# Altium PCB Flight_Computer_1.PcbDoc (part 1 of 4)
Units mm, origin at the board's own origin, x right, y up, seen from the top; angles counter-clockwise.
Board outline 101.6 x 76.2 mm, 4 copper layers (Top Layer, GND, 3.3V, Bottom Layer), stack 1.574 mm thick; 111 components, 86 nets, 493 pads, 1677 vias.
Unrouted connection lines stored in the file: 302.
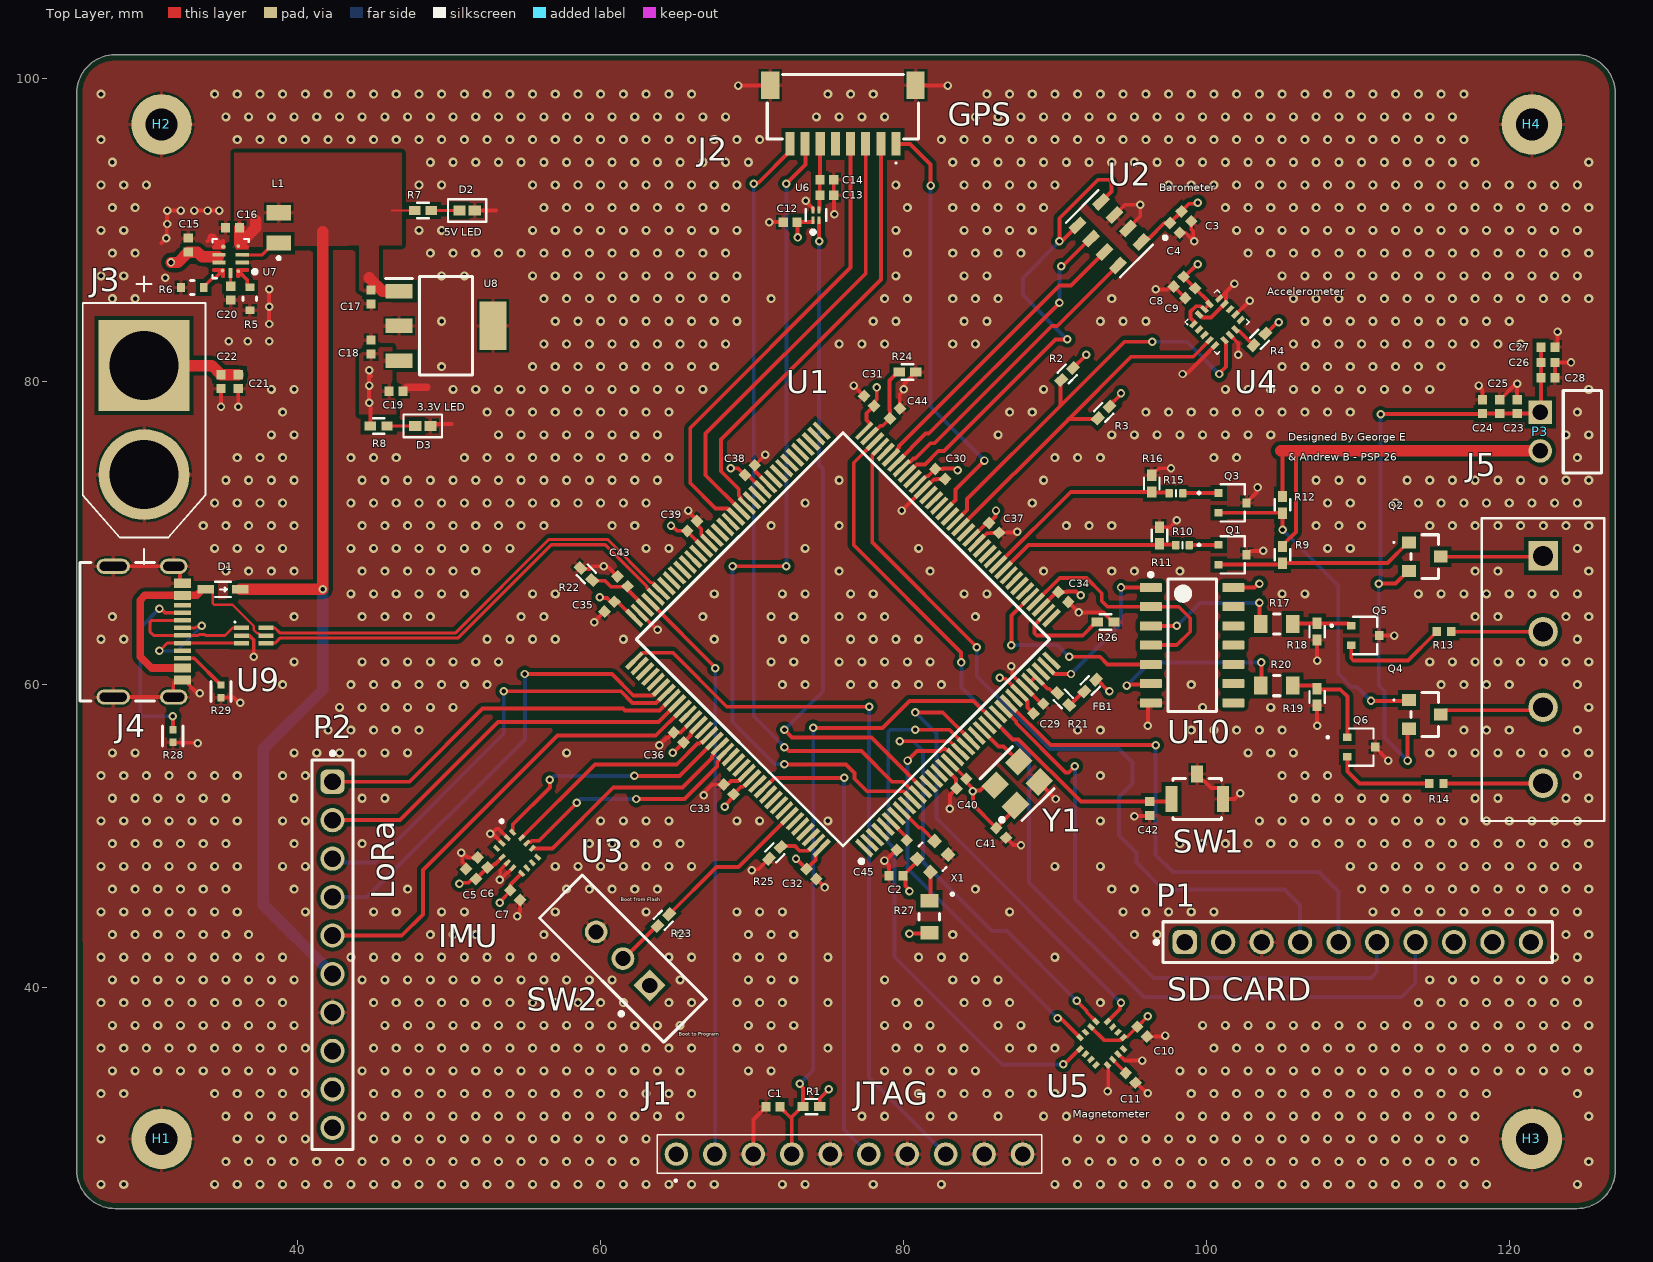
[diagram p0: Top Layer view]
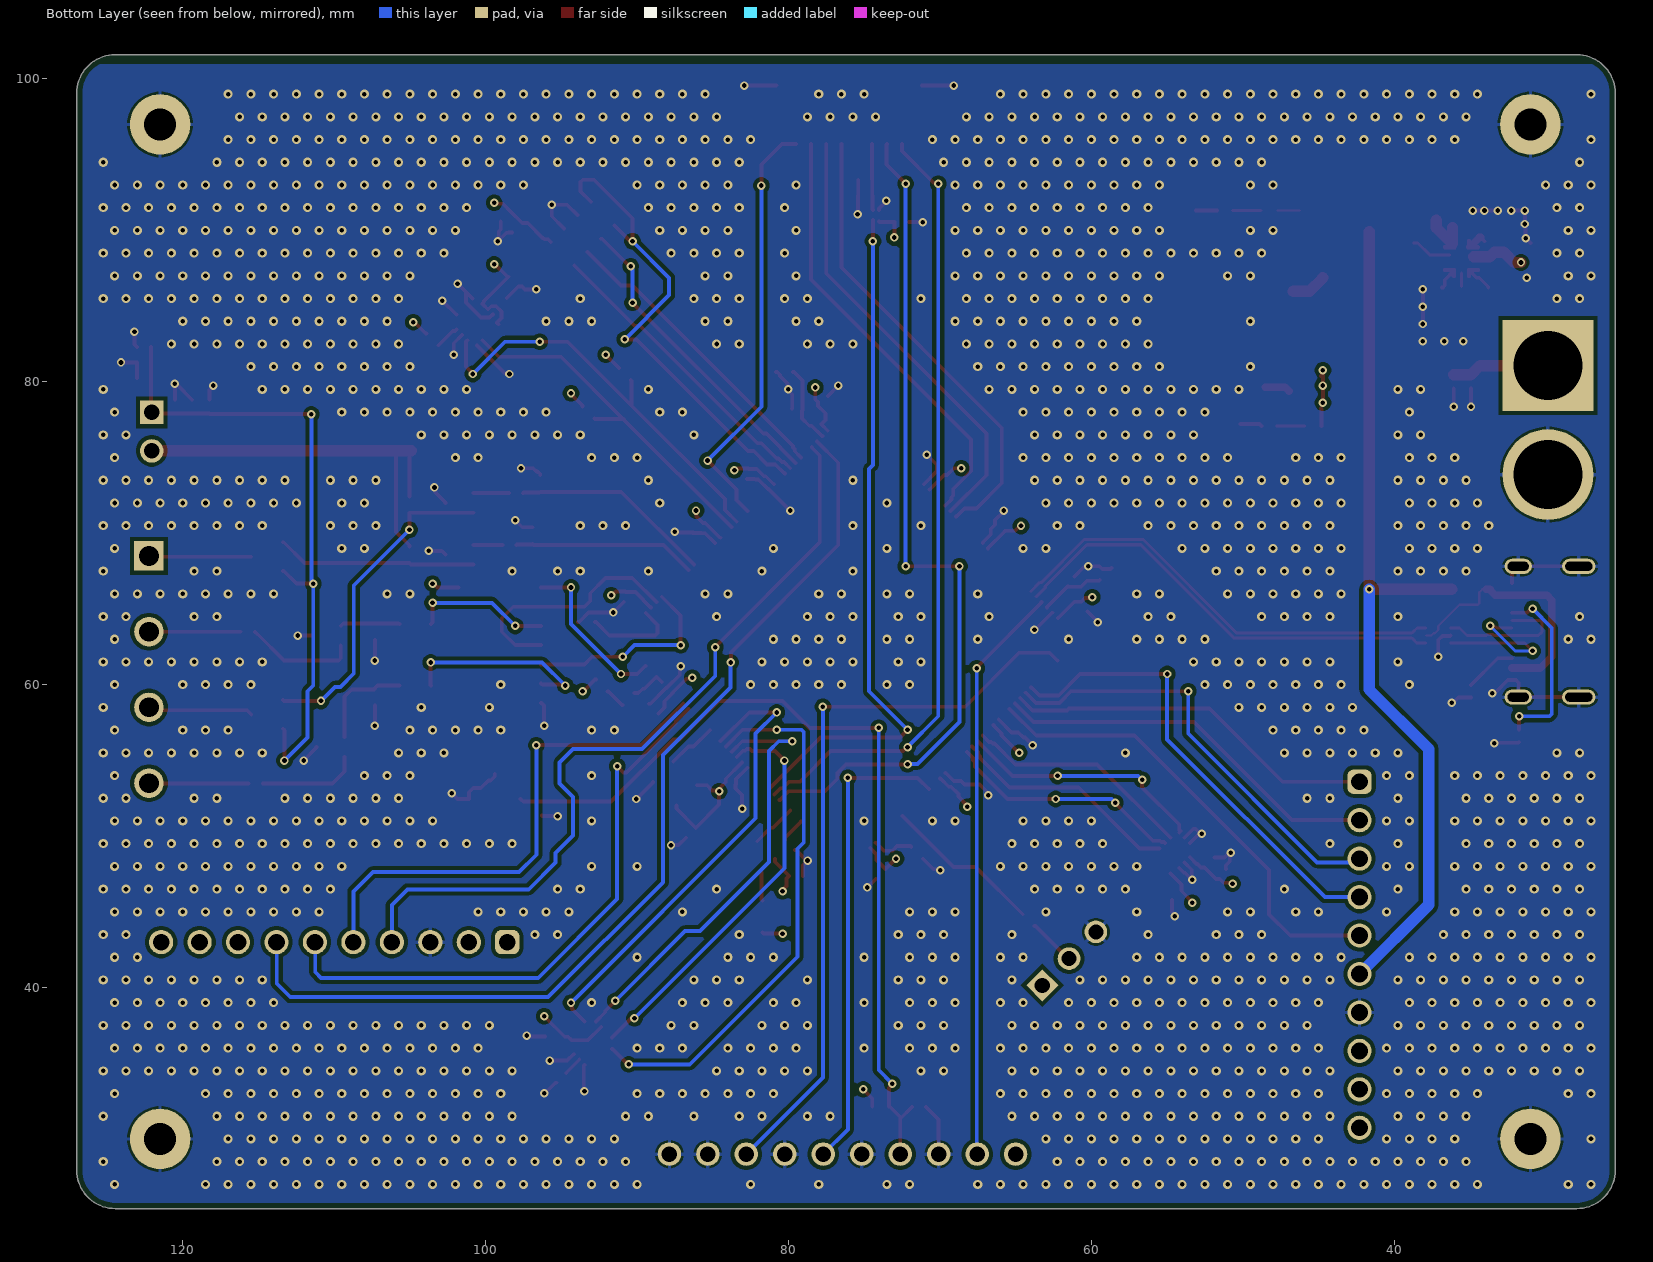
[diagram p1: Bottom Layer view, seen from below]
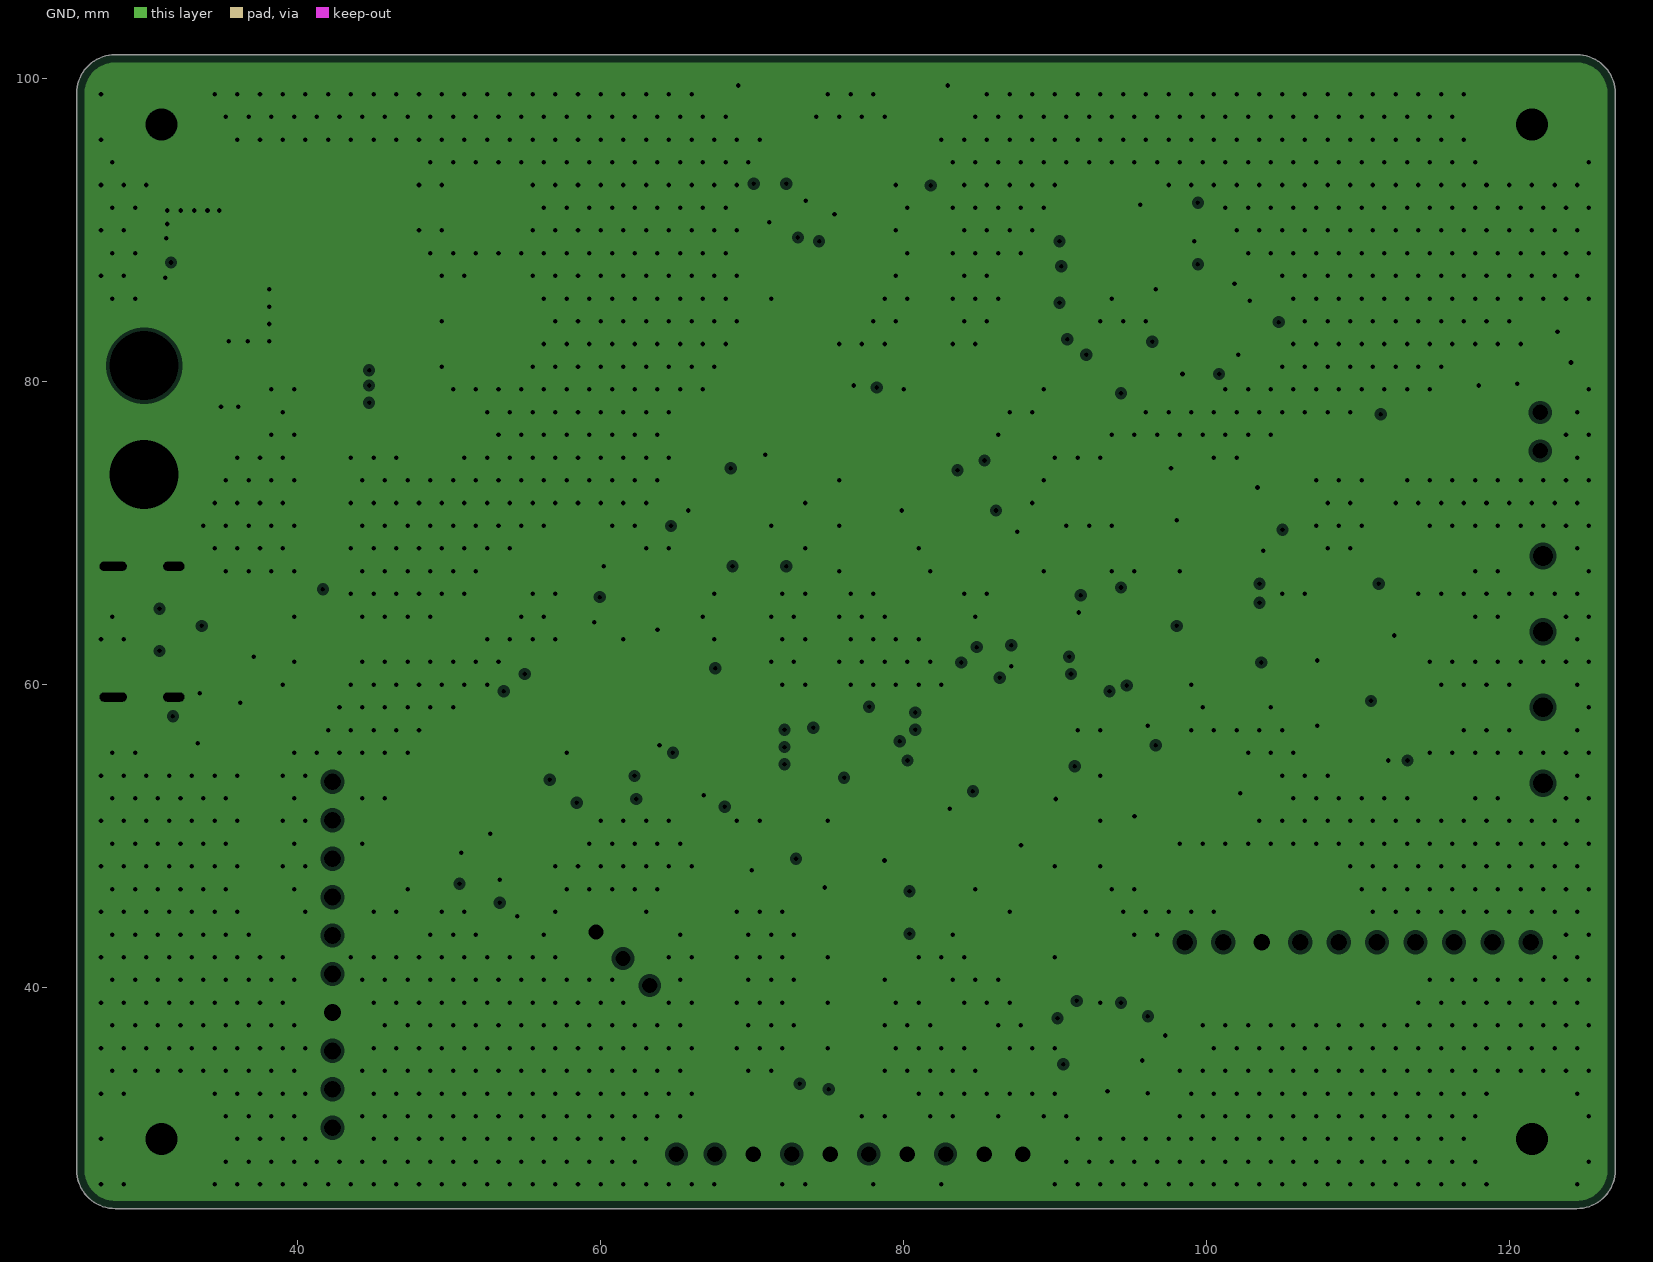
[diagram p2: GND, clearances drawn from the general rule]
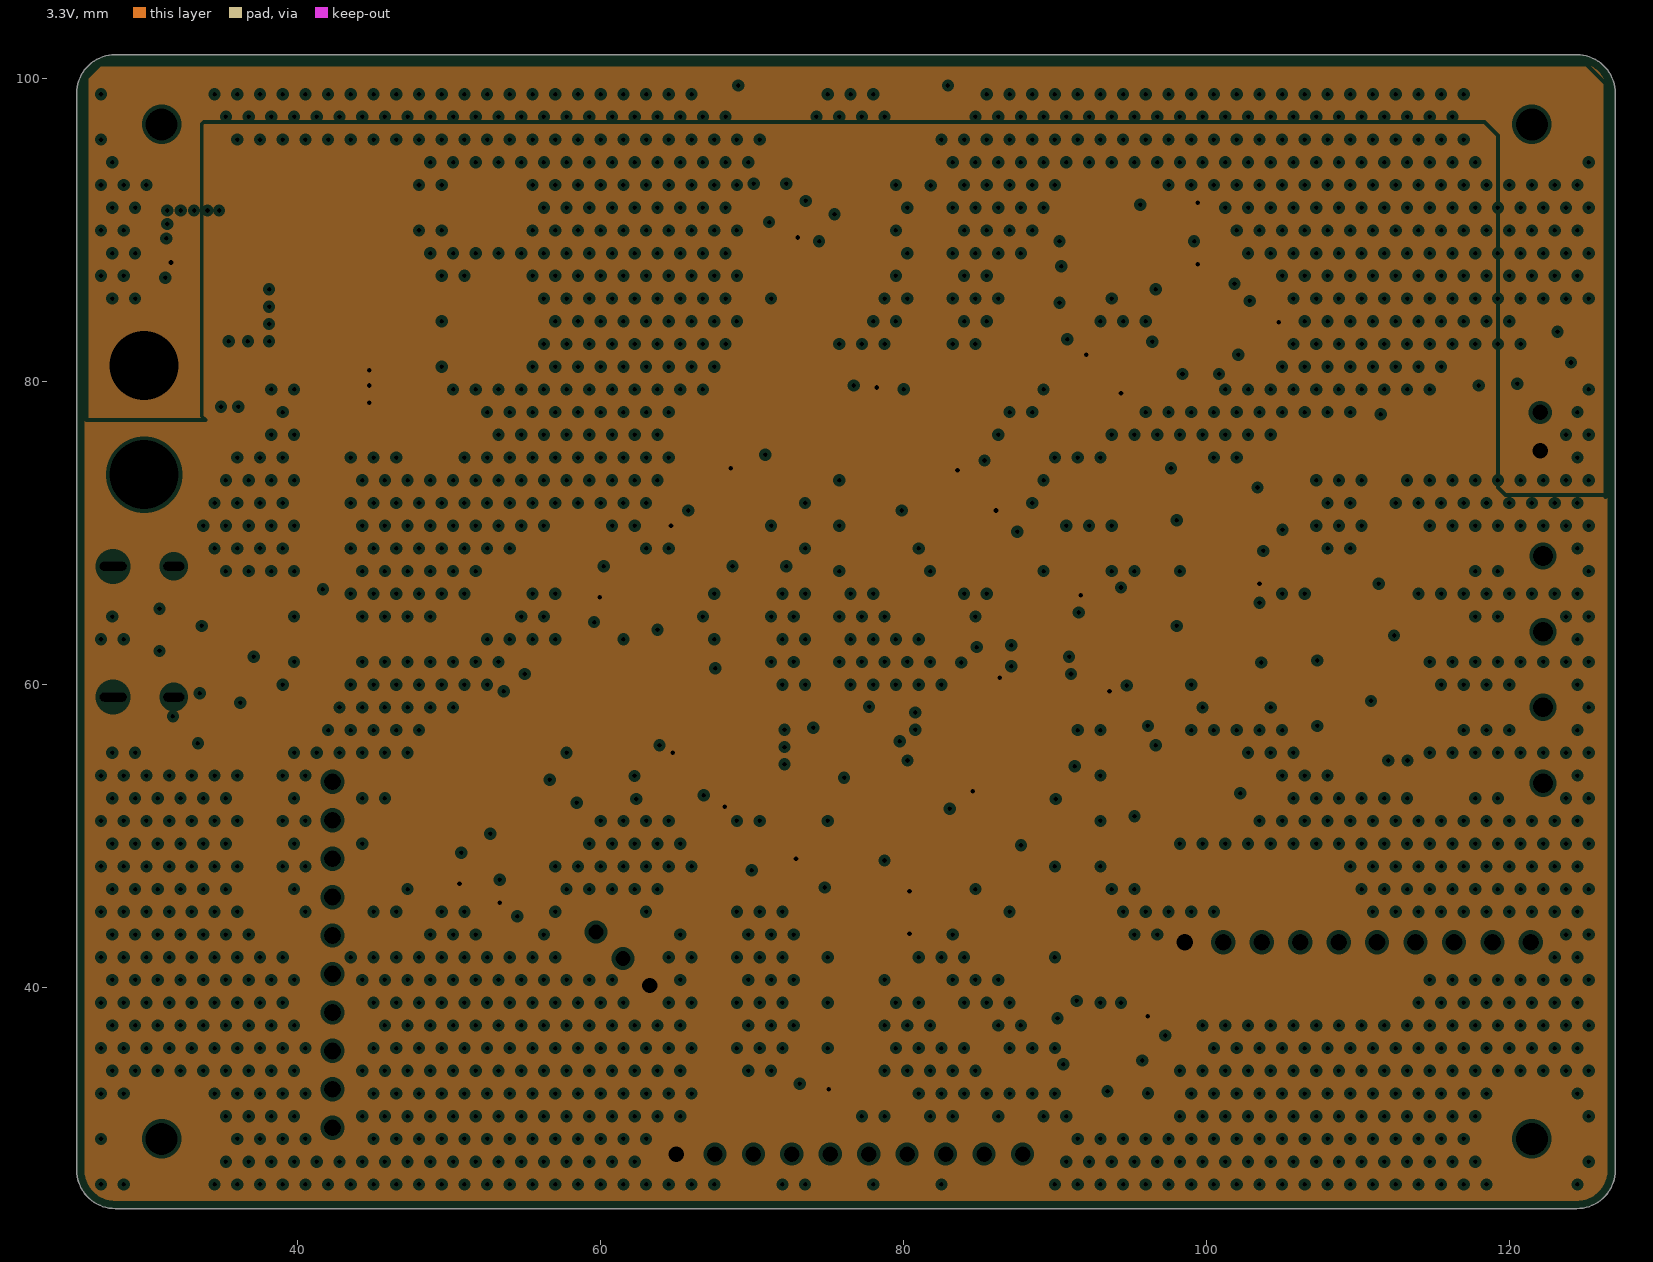
[diagram p3: 3.3V, clearances drawn from the general rule]
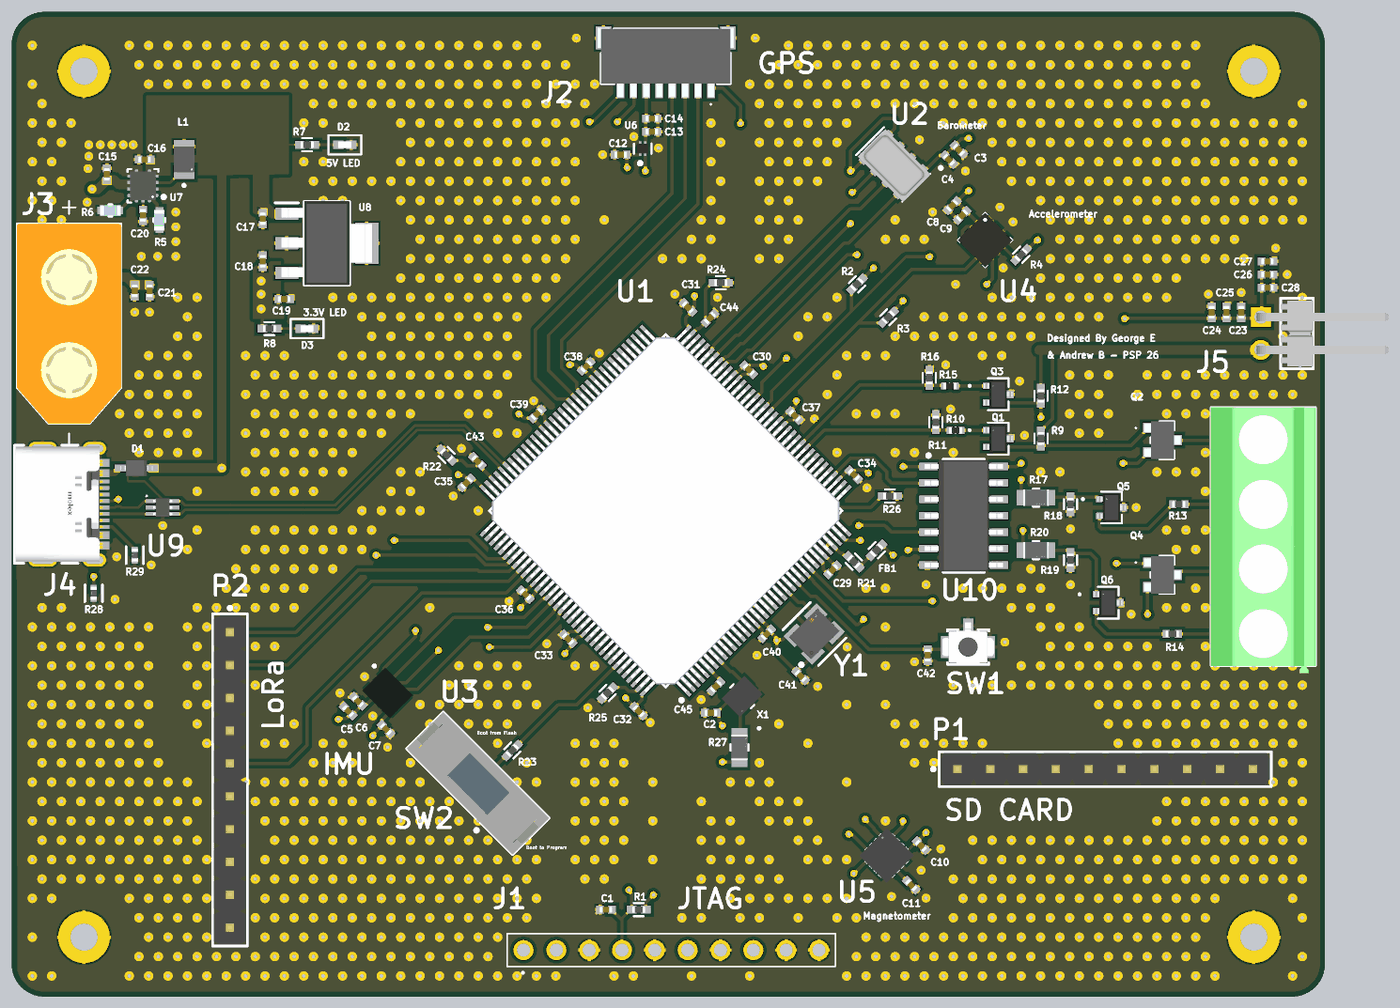
[diagram p5: 3D render of the assembled board from above, using the file's embedded part models]

## Layer stack, top to bottom
Top Solder: solder mask 0.0102, Solder Resist, Dk 3.5
Top Layer: signal copper 0.035
Dielectric 2: prepreg 0.1846, PP-006, Dk 4.4
GND: plane copper 0.035, net GND
Dielectric 1: dielectric 1.065, FR-4, Dk 4.8
3.3V: plane copper 0.035, net (Multiple Nets)
Dielectric 3: prepreg 0.1846, PP-006, Dk 4.4
Bottom Layer: signal copper 0.035
Bottom Solder: solder mask 0.0102, Solder Resist, Dk 3.5

## Board outline
25.4,27.94 25.4,99.06 cw(c27.94,99.06) 27.94,101.6 124.46,101.6 cw(c124.46,99.06) 127,99.06 127,27.94 cw(c124.46,27.94) 124.46,25.4 27.94,25.4 cw(c27.94,27.94)

## Design rules (kind name [scope] priority, off if disabled: settings)
BoardOutlineClearance [All] p1: gap=0.381 ignorepadtopadclearanceinfootprint=FALSE
Clearance "Clearance Polygons" [InPolygon] p1: gap=0.254 ignorepadtopadclearanceinfootprint=FALSE
Clearance [All] p2: gap=0.127 ignorepadtopadclearanceinfootprint=FALSE
ComponentClearance "HM-TRP & UFL" [InComponent('X1') vs InComponent('U1')] p1: gap=0 collisioncheckmode=3 verticalgap=0 showdistances=FALSE
ComponentClearance [All] p2: gap=0.025 collisioncheckmode=3 verticalgap=0.025 showdistances=FALSE
DiffPairsRouting USBDIFF90 [All] p1: maxlimit=0.1 minlimit=0.1 mostfreqgap=0.152 toplayer_minwidth=0.202 toplayer_maxwidth=0.202 toplayer_prefwidth=0.247 bottomlayer_minwidth=0.202 bottomlayer_maxwidth=0.202 bottomlayer_prefwidth=0.247 impedanceprofiledriven=TRUE impedanceprofileid={24B08B54-F0FF-471F-A850-5E2F393EB6C5} impedanceprofilevalue=90.000000 maxuncoupledlength=12.7
HoleSize [All] p1: absolutevalues=TRUE maxlimit=6.731 minlimit=0.254 maxpercent=80.000 minpercent=20.000
HoleToHoleClearance [All] p1: gap=0.254 allowstackedmicrovias=FALSE
MinimumAnnularRing [All] p1: minimumring=0.102
MinimumSolderMaskSliver [All] p1: minsoldermaskwidth=0
PlaneClearance [All] p1: clearance=0.254
PlaneConnect [All] p1: planeconnectstyle=Relief reliefexpansion=0.102 reliefentries=4 reliefconductorwidth=0.152 reliefairgap=0.152
PolygonConnect "Via connect style" [isVia] p1: connectstyle=Direct reliefconductorwidth=0.254 reliefentries=4 polygonreliefangle="90 Angle" airgapwidth=0.254
PolygonConnect [All] p2: connectstyle=Relief reliefconductorwidth=0.254 reliefentries=4 polygonreliefangle="90 Angle" airgapwidth=0.152
RoutingCorners [All] p1: cornerstyle=45-Degree minsetback=1.25 maxsetback=1.25
RoutingVias [All] p1: holewidth=0.305 width=0.559 viastyle="Through Hole" minholewidth=0.254 minwidth=0.559 maxholewidth=2.54 maxwidth=2.896
SilkToSilkClearance [All] p1: silktosilkclearance=0
SilkToSolderMaskClearance [IsPad] p1: minsilkscreentomaskgap=0.127 clearancetoexposedcopper=TRUE
SolderMaskExpansion [All] p1: expansion=0.064 istentingtop=FALSE
SupplyNets "Schematic Supply Nets_6" [InNet('3V3')] p1: voltage=0.000
SupplyNets "Schematic Supply Nets_4" [InNet('VBAT')] p2: voltage=0.000
SupplyNets "Schematic Supply Nets_3" [InNet('BATT')] p3: voltage=0.000
SupplyNets "Schematic Supply Nets_2" [InNet('UVBUS')] p4: voltage=0.000
SupplyNets "Schematic Supply Nets_1" [InNet('5V')] p5: voltage=0.000
SupplyNets "Schematic Supply Nets" [InNet('GND')] p6: voltage=0.000
Width UVBUS [InNet('UVBUS')] p1: maxlimit=0.5 minlimit=0.203 preferedwidth=0.5 toplayer_minwidth=0.203 minimp=50.000000 maximp=50.000000 favimp=50.000000
Width GND [InNetClass('GND')] p2: maxlimit=1 minlimit=0.254 preferedwidth=0.5
Width 3V3 [InNetClass('3V3')] p3: maxlimit=0.762 minlimit=0.254 preferedwidth=0.508
Width Power [InNetClass('Power')] p4: maxlimit=10.16 minlimit=0.152 preferedwidth=0.75
Width [All] p5: maxlimit=0.254 minlimit=0.254 preferedwidth=0.254
20 further rules are at their usual default settings.

## Classes and differential pairs
net class 3V3: 3V3
net class GND: GND
net class Power: 3V3 5V BATT UVBUS
differential pair class "DIFF 90": CON_USB
differential pair class DIFF90: USB_D
component class Pyro_Channel: C23 C24 C25 C26 C27 C28 J5 P3 Q1 Q2 Q3 Q4 Q5 Q6 R9 R10 R11 R12 R13 R14 R15 R16 R17 R18 R19 R20 U10
component class MCU: C1 C2 J1 R1 R27 U1 X1
component class Sensors: C3 C4 C5 C6 C7 C8 C9 C10 C11 C12 C13 C14 J2 P1 P2 R2 R3 R4 U2 U3 U4 U5 U6
component class Power: C15 C16 C17 C18 C19 C20 C21 C22 J3 L1 R5 R6 U7 U8
component class MCU_POWER: C29 C30 C31 C32 C33 C34 C35 C36 C37 C38 C39 C40 C41 C42 C43 C44 C45 FB1 R21 R22 R23 R24 R25 R26 SW1 SW2 Y1
component class Connector: D1 D2 D3 H1 H2 H3 H4 J4 R7 R8 R28 R29 U9
differential pair USB_D: +USB_D_P -USB_D_N
differential pair CON_USB: +CON_USB_P -CON_USB_N

## Components (designator, comment, footprint, x,y, rotation, side; value= is the part's Value field where it differs from the comment)
C1 "100nF" 0402_C#1 71.374,32.131 r0 top
C2 "100nF" 0402_C#1 79.502,47.371 r180 top
C3 "10uF" 0402_C#1 98.679,90.932 r135 top value=10µF
C4 "100nF" 0402_C#1 97.917,90.17 r135 top
C5 "10uF" 0402_C#1 51.435,47.498 r315 top value=10µF
C6 "100nF" 0402_C#1 52.197,48.26 r315 top
C7 "100nF" 0402_C#1 54.356,46.101 r135 top
C8 "10uF" 0402_C#1 98.171,86.614 r45 top value=10µF
C9 "100nF" 0402_C#1 98.933,85.852 r45 top
C10 "CL05A105KL5NRNC" 0402_C#2 95.758,37.084 r135 top value=1µF
C11 "10uF" 0402_C#1 94.996,34.036 r135 top value=10µF
C12 "CL05A105KL5NRNC" 0402_C#2 72.517,90.551 r0 top value=1µF
C13 "100nF" 0402_C#1 74.93,92.329 r180 top
C14 "100nF" 0402_C#1 74.93,93.345 r180 top
C15 "10uF" 0402_C#1 32.766,89.027 r90 top value=10µF
C16 "22uF" 0402_C#1 35.687,90.17 r0 top value=22µF
C17 "4.7uF" 0402_C#1 44.831,85.598 r270 top
C18 "10uF" 0402_C#1 44.831,82.296 r270 top value=10µF
C19 "10uF" 0402_C#1 46.482,79.375 r180 top value=10µF
C20 "3.3nF" 0402_C#1 35.56,85.852 r90 top
C21 "10uF" 0402_C#1 36.068,80.01 r270 top value=10µF
C22 "10uF" 0402_C#1 34.925,80.01 r270 top value=10µF
C23 "CL05A105KL5NRNC" 0402_C#2 120.523,78.359 r270 top value=1µF
C24 "100nF" 0402_C#1 118.237,78.359 r270 top
C25 "100nF" 0402_C#1 119.38,78.359 r270 top
C26 "CL05A105KL5NRNC" 0402_C#2 122.555,81.28 r180 top value=1µF
C27 "100nF" 0402_C#1 122.555,82.296 r180 top
C28 "100nF" 0402_C#1 122.555,80.264 r180 top
C29 "100nF" 0402_C#1 88.9,58.42 r45 top
C30 "100nF" 0402_C#1 82.423,73.914 r315 top
C31 "100nF" 0402_C#1 77.724,78.74 r135 top
C32 "100nF" 0402_C#1 73.914,47.498 r315 top
C33 "100nF" 0402_C#1 68.453,53.086 r135 top
C34 "100nF" 0402_C#1 90.551,65.786 r315 top
C35 "100uF" 0402_C#1 60.579,65.151 r225 top value=4.7uF
C36 "100nF" 0402_C#1 65.151,56.515 r135 top
C37 "100nF" 0402_C#1 85.979,70.358 r315 top
C38 "100nF" 0402_C#1 69.85,74.168 r45 top
C39 "100nF" 0402_C#1 66.04,70.485 r45 top
C40 "100nF" 0402_C#1 83.82,53.467 r225 top
C41 "100nF" 0402_C#1 86.444,50.214 r315 top
C42 "100nF" 0402_C#1 96.266,51.816 r270 top
C43 "2.2uF" 0402_C#1 61.441,66.829 r135 top value=2.2µF
C44 "2.2uF" 0402_C#1 79.432,77.908 r45 top value=2.2µF
C45 "100nF" 0402_C#1 79.883,49.403 r225 top
D1 "BAT60JFILM" SOD2513X117N 35.052,66.294 r180 top
D2 "RED" LEDC1005X35N 51.181,91.313 r180 top
D3 "GREEN" LEDC1005X35N 48.252,77.089 r180 top
FB1 "FB0402" 0402_R#1 92.329,59.944 r225 top
H1 "M2" "Mounting Hole"#1 30.226,30.226 r0 top
H2 "M2" "Mounting Hole"#2 31.623,97.79 r0 top
H3 "M2" "Mounting Hole"#3 122.555,29.21 r0 top
H4 "M2" "Mounting Hole"#4 122.555,98.298 r0 top
J1 "TSW-110-07-T-S" TSW-110-XX-YY-S 65,29 r0 top locked
J2 "SM08B-SRSS-TB" SM08BSRSSTBLFSN 76,98 r180 top locked
J3 "XT60-M" AMASS_XT60-M 29.845,77.47 r270 top
J4 "2171790001" FP-2171790001-MFG 28.956,63.5 r270 top
J5 "1729034" 1729034 122.231,68.5 r270 top
L1 "1uH" AOTAB201610S3R3101T 38.735,90.17 r90 top value=2.2µH
P1 "61301011121" 61301011121 110,43 r0 top locked
P2 "61301011121" 61301011121 42.291,42.164 r270 top
P3 "TSW-102-08-F-S-NA" SMTC-TSW-102-08-X-S-NA 122.047,77.978 r270 top
Q1 "PMF63UNEX" PMF63UNEX-Footprint-1 101.727,68.58 r270 top
Q2 "SSM3J372R,LF" SSM3J372RLF 114.427,68.453 r270 top
Q3 "PMF63UNEX" PMF63UNEX-Footprint-1 101.727,72.009 r270 top
Q4 "SSM3J372R,LF" SSM3J372RLF 114.427,58.039 r270 top
Q5 "PMF63UNEX" PMF63UNEX-Footprint-1 110.49,63.246 r270 top
Q6 "PMF63UNEX" PMF63UNEX-Footprint-1 110.236,55.88 r270 top
R1 "10k" 0402_R#1 73.914,32.131 r0 top value=10kΩ
R2 "4K7" 0402_R#1 90.805,80.518 r45 top value=4.7kΩ
R3 "4K7" 0402_R#1 93.218,77.978 r45 top value=4.7kΩ
R4 "10k" 0402_R#1 103.505,82.804 r45 top value=10kΩ
R5 "76.8k" FP-RK73H1J-MFG 36.83,85.483 r270 top
R6 "40.2k" FP-RK73H1J-MFG 33.032,86.233 r180 top
R7 "5k1" 0402_R#1 48.26,91.313 r180 top value=5.1kΩ
R8 "1k" 0402_R#1 45.339,77.089 r180 top value=1kΩ
R9 "10k" 0402_R#1 105.029,68.58 r270 top value=10kΩ
R10 "Resistor 22R  +/-5 % 0402 63 mW" RESC0402(1005)_L 98.425,69.215 r180 top value=22
R11 "10k" 0402_R#1 96.901,69.85 r270 top value=10kΩ
R12 "10k" 0402_R#1 105.029,71.882 r270 top value=10kΩ
R13 "0R" 0402_R#2 115.697,63.5 r0 top value=0Ω
R14 "0R" 0402_R#2 115.189,53.467 r0 top value=0Ω
R15 "Resistor 22R  +/-5 % 0402 63 mW" RESC0402(1005)_L 97.986,72.644 r180 top value=22
R16 "10k" 0402_R#1 96.393,73.279 r270 top value=10kΩ
R17 "AC0805JR-070RL" FP-AC0805-0_6-MFG 104.648,64.008 r0 top
R18 "10k" 0402_R#1 107.315,63.5 r90 top value=10kΩ
R19 "10k" 0402_R#1 107.315,59.182 r90 top value=10kΩ
R20 "AC0805JR-070RL" FP-AC0805-0_6-MFG 104.648,59.944 r0 top
R21 "0R" 0402_R#1 90.551,59.055 r135 top value=0Ω
R22 "0R" 0402_R#1 59.055,67.31 r135 top value=0Ω
R23 "10k" 0402_R#1 64.135,44.45 r225 top value=10kΩ
R24 "0R" 0402_R#1 80.264,80.645 r0 top value=0Ω
R25 "0R" 0402_R#1 71.501,48.895 r225 top value=0Ω
R26 "0R" 0402_R#1 93.345,64.135 r0 top value=0Ω
R27 "10k" FP-AC0805-0_6-MFG 81.706,44.678 r90 top
R28 "RN73R1ETTP5101F25" FP-RN73R1E-IPC_C 31.75,56.609 r270 top
R29 "RN73R1ETTP5101F25" FP-RN73R1E-IPC_C 34.925,59.563 r270 top
SW1 "B3U-1100PM" FP-B3U-1100PM-MFG 99.392,52.451 r180 top
SW2 "EG1218" ESWI-EG1218_V 61.468,41.91 r135 top
U1 "STM32F765ZIT7" QFP50P2200X2200X160-144N 76,62.992 r135 top locked
U2 "MS560702BA03-50" MS5607-02BA03 93.599,89.789 r225 top
U3 "ASM330LHHTR" LSM6DS3USTR 54.483,48.895 r315 top
U4 "H3LIS100DLTR" H3LIS100DLTR 100.711,83.947 r45 top locked
U5 "MMC5983MA" MMC5983MA_MEM 93.091,36.322 r315 top
U6 "TPS22991BNRAAR" TPS22991BNRAAR-Footprint-1 74.222,91.015 r90 top
U7 "TPS62993QRYTRQ1" RYT0009A-MFG 35.56,88.138 r180 top
U8 "TL1963A-33DCYR" SOT230P700X180-4N 49.784,83.693 r0 top
U9 "USBLC6-2P6" USBLC62P6 37.084,63.246 r270 top
U10 "SN74LVC08ADR" D0014A_N 99.057,62.611 r0 top locked
X1 "DSA6101JL2B-032K768VAO" VLGA4_AUA_MCH 81.915,48.641 r135 top
Y1 "SIT8008BI-22-33E-8.000000G" FP-SiT8008-2-MFG 87.503,53.467 r45 top

## Footprints (in the part's own frame and the unit in brackets; to place one, negate y for a bottom-side part, rotate by r counter-clockwise, add the part's x,y. Pads: shape width x height; smd on the part's side, far side on the other; paste and mask are expansions set on the pad)
0402_C#1 [mm]
  rect 0.6x0.62 smd: 1(-0.46,0) 2(0.46,0)
  Top Layer region: -1.397,0.254 -1.397,0.254 -1.397,0.254 -1.397,0.254
  body extent -0.5,-0.25 0.5,0.25, height 0.55
0402_C#2 [mm]
  rect 0.6x0.62 smd: 1(-0.46,0) 2(0.46,0)
  body extent -0.5,-0.25 0.5,0.25, height 0.55
0402_R#1 [mm]
  rect 0.75x0.6 smd: 1(-0.55,0) 2(0.55,0)
  silkscreen extent -0.38,-0.51 0.38,0.51, body extent -0.5,-0.25 0.5,0.25, height 0.4
0402_R#2 [mm]
  rect 0.55x0.6 smd: 1(-0.475,0) 2(0.475,0)
  body extent -0.5,-0.25 0.5,0.25, height 0.4
1729034 [mm]
  rect 1.95x1.95 hole 1.3: 1(0,0)
  round 1.95 hole 1.3: 2(5,0) 3(10,0) 4(15,0)
  silkscreen extent -2.5,-4.05 17.5,4.05, body extent -2.49,-4.08 18.08,4.07, height 10.51
61301011121 [mm] "Pin Header, pitch 2.54 mm, THT, Vertical, single row, 10p"
  rrect50% 1.6x1.6 hole 1.1: 1(-11.43,0)
  round 1.6 hole 1.1: 2(-8.89,0) 3(-6.35,0) 4(-3.81,0) 5(-1.27,0) 6(1.27,0) 7(3.81,0) 8(6.35,0) 9(8.89,0) 10(11.43,0)
  silkscreen extent -13.42,-1.35 12.85,1.35, body extent -12.7,-1.27 12.7,1.27, height 8.57
AMASS_XT60-M [mm]
  round 6 hole 4.55: N(3.6,0)
  rect 6x6 / inner round 6 / far side rect 6x6 hole 4.55: P(-3.6,0)
  silkscreen extent -9.5,-4.05 9.5,4.05, body extent -7.75,-4.05 7.75,4.05, height 16
AOTAB201610S3R3101T [mm]
  rect 1x1.6 smd: 1(-1,0) 2(1,0)
  silkscreen extent -2.1,-0.1 -1.9,0.1, body extent -1,-0.8 1,0.8, height 1
D0014A_N [mm] "SOIC, 14-Leads, Body 8.75x4mm, Pitch 1.27mm, IPC Medium Density"
  rrect17% 1.45x0.6 smd: 1(-2.725,3.81) 2(-2.725,2.54) 3(-2.725,1.27) 4(-2.725,0) 5(-2.725,-1.27) 6(-2.725,-2.54) 7(-2.725,-3.81) 8(2.725,-3.81) 9(2.725,-2.54) 10(2.725,-1.27) 11(2.725,0) 12(2.725,1.27) 13(2.725,2.54) 14(2.725,3.81)
  silkscreen extent -2.85,-4.38 1.6,4.78, body extent -3.02,-4.32 3.02,4.32, height 1.59
ESWI-EG1218_V [mm] "THD, 3-Leads, Body 11.6x4mm, Pitch 2.5mm"
  rect 1.5x1.5 hole 1: 1(-2.5,0)
  round 1.5 hole 1: 2(0,0) 3(2.5,0)
  silkscreen extent -5.8,-2 5.8,2.77, body extent -5.8,-2 5.8,2, height 7.4
FP-2171790001-MFG [mm]
  rect 0.6x1.15 smd paste+0 mask+0: A1B12(-3.2,3.425) A4B9(-2.4,3.425) B1A12(3.2,3.425) B4A9(2.4,3.425)
  rect 0.3x1.15 smd paste+0 mask+0: A5(-1.25,3.425) A6(-0.25,3.425) A7(0.25,3.425) A8(1.25,3.425) B5(1.75,3.425) B6(0.75,3.425) B7(-0.75,3.425) B8(-1.75,3.425)
  rrect100% 1x1.8 hole 1.4 slot 0.6 at 0 deg paste-2539.97 mask+0: S1(-4.32,2.85) S2(4.32,2.85)
  rrect100% 1x2.2 hole 1.8 slot 0.6 at 0 deg paste-2539.97 mask+0: S3(-4.32,-1.15) S4(4.32,-1.15)
  silkscreen extent -4.57,-3.35 4.57,1.58, body extent -4.92,-3.45 4.92,4.1, height 0.25
FP-AC0805-0_6-MFG [mm]
  rect 0.9x1.2 smd paste+0 mask+0: 1(-1.05,0) 2(1.05,0)
  silkscreen extent -0.23,-0.67 0.23,0.67, body extent -1.6,-0.77 1.6,0.77, height 0.25
FP-B3U-1100PM-MFG [mm]
  rect 0.8x1.7 smd paste+0 mask+0: 1(1.7,0) 2(-1.7,0)
  rect 0.8x1.1 smd paste+0 mask+0: 3(0,-1.65)
  silkscreen extent -1.6,-1.35 1.6,1.35, body extent -2.2,-2.3 2.2,1.45, height 0.25
FP-RK73H1J-MFG [mm]
  rect 0.5x0.6 smd paste+0 mask+0: 1(-0.75,0) 2(0.75,0)
  silkscreen extent -0.13,-0.45 0.13,0.45, body extent -1.1,-0.55 1.1,0.55, height 0.25
FP-RN73R1E-IPC_C [mm]
  rect 0.488x0.472 smd paste+0 mask+0: 1(-0.414,0) 2(0.414,0)
  silkscreen extent -0.66,-0.67 0.66,0.67, body extent -0.76,-0.38 0.76,0.38, height 0.25
FP-SiT8008-2-MFG [mm]
  rect 1.4x1.2 smd paste+0 mask+0: 1(-1.1,-0.95) 2(1.1,-0.95) 3(1.1,0.95) 4(-1.1,0.95)
  silkscreen extent -2.52,-1.95 1.5,1.95, body extent -1.9,-1.65 1.9,1.65, height 0.25
H3LIS100DLTR [mm]
  rect 0.55x0.3 smd: 1(-1.2,1) 2(-1.2,0.5) 3(-1.2,0) 4(-1.2,-0.5) 5(-1.2,-1) 9(1.2,-1) 10(1.2,-0.5) 11(1.2,0) 12(1.2,0.5) 13(1.2,1)
  rect 0.3x0.55 smd: 6(-0.5,-1.2) 7(0,-1.2) 8(0.5,-1.2) 14(0.5,1.2) 15(0,1.2) 16(-0.5,1.2)
  silkscreen extent -1.5,-1.5 1.5,1.5, body extent -1.5,-1.5 1.5,1.5, height 1
LEDC1005X35N [mm]
  rect 0.8x0.65 smd: 1(-0.5,0) 2(0.5,0)
  silkscreen extent -1.27,-0.75 1.27,0.75, body extent -0.5,-0.25 0.5,0.25, height 0.36
LSM6DS3USTR [mm]
  rect 0.475x0.25 smd: 1(-1.163,0.75) 2(-1.163,0.25) 3(-1.163,-0.25) 4(-1.163,-0.75) 8(1.163,-0.75) 9(1.163,-0.25) 10(1.163,0.25) 11(1.163,0.75)
  rect 0.25x0.475 smd: 5(-0.5,-0.912) 6(0,-0.912) 7(0.5,-0.912) 12(0.5,0.912) 13(0,0.912) 14(-0.5,0.912)
  silkscreen extent -2.3,0.65 -2.1,0.85, body extent -1.5,-1.25 1.5,1.25, height 0.86
MMC5983MA_MEM [mm]
  rect 0.457x0.305 smd paste+0 mask+0: 1(-1.275,0.75) 2(-1.275,0.25) 3(-1.275,-0.25) 4(-1.275,-0.75) 9(1.275,-0.75) 10(1.275,-0.25) 11(1.275,0.25) 12(1.275,0.75)
  rect 0.305x0.457 smd paste+0 mask+0: 5(-0.75,-1.275) 6(-0.25,-1.275) 7(0.25,-1.275) 8(0.75,-1.275) 13(0.75,1.275) 14(0.25,1.275) 15(-0.25,1.275) 16(-0.75,1.275)
  body extent -1.55,-1.55 1.55,1.55, height 0.99
"Mounting Hole"#1 [mm]
  round 4 hole 2.1: 1(0.774,-0.226)
"Mounting Hole"#2 [mm]
  round 4 hole 2.1: 1(-0.623,-0.79)
"Mounting Hole"#3 [mm]
  round 4 hole 2.1: 1(-1.055,0.79)
"Mounting Hole"#4 [mm]
  round 4 hole 2.1: 1(-1.055,-1.298)
MS5607-02BA03 [mm]
  rect 1.1x0.6 smd: 1(-1.1,1.875) 2(-1.1,0.625) 3(-1.1,-0.625) 4(-1.1,-1.875) 5(1.1,-1.875) 6(1.1,-0.625) 7(1.1,0.625) 8(1.1,1.875)
  silkscreen extent -2.51,-2.54 1.52,2.89, body extent -1.5,-2.4 1.5,2.6, height 0.95
PMF63UNEX-Footprint-1 [mm]
  rect 0.5x0.55 smd: 1(-0.65,-0.925) 2(0.65,-0.925)
  rect 0.6x0.55 smd: 3(0,0.925)
  silkscreen extent -1.23,-2.29 1.23,0.8, body extent -1.1,-1.1 1.1,1.1, height 0.99
QFP50P2200X2200X160-144N [mm]
  rect 1.475x0.3 smd: 1(-10.738,8.75) 2(-10.738,8.25) 3(-10.738,7.75) 4(-10.738,7.25) 5(-10.738,6.75) 6(-10.738,6.25) 7(-10.738,5.75) 8(-10.738,5.25) 9(-10.738,4.75) 10(-10.738,4.25) 11(-10.738,3.75) 12(-10.738,3.25) 13(-10.738,2.75) 14(-10.738,2.25) 15(-10.738,1.75) 16(-10.738,1.25) 17(-10.738,0.75) 18(-10.738,0.25) 19(-10.738,-0.25) 20(-10.738,-0.75) 21(-10.738,-1.25) 22(-10.738,-1.75) 23(-10.738,-2.25) 24(-10.738,-2.75) 25(-10.738,-3.25) 26(-10.738,-3.75) 27(-10.738,-4.25) 28(-10.738,-4.75) 29(-10.738,-5.25) 30(-10.738,-5.75) 31(-10.738,-6.25) 32(-10.738,-6.75) 33(-10.738,-7.25) 34(-10.738,-7.75) 35(-10.738,-8.25) 36(-10.738,-8.75) 73(10.738,-8.75) 74(10.738,-8.25) 75(10.738,-7.75) 76(10.738,-7.25) 77(10.738,-6.75) 78(10.738,-6.25) 79(10.738,-5.75) 80(10.738,-5.25) 81(10.738,-4.75) 82(10.738,-4.25) 83(10.738,-3.75) 84(10.738,-3.25) 85(10.738,-2.75) 86(10.738,-2.25) 87(10.738,-1.75) 88(10.738,-1.25) 89(10.738,-0.75) 90(10.738,-0.25) 91(10.738,0.25) 92(10.738,0.75) 93(10.738,1.25) 94(10.738,1.75) 95(10.738,2.25) 96(10.738,2.75) 97(10.738,3.25) 98(10.738,3.75) 99(10.738,4.25) 100(10.738,4.75) 101(10.738,5.25) 102(10.738,5.75) 103(10.738,6.25) 104(10.738,6.75) 105(10.738,7.25) 106(10.738,7.75) 107(10.738,8.25) 108(10.738,8.75)
  rect 0.3x1.475 smd: 37(-8.75,-10.738) 38(-8.25,-10.738) 39(-7.75,-10.738) 40(-7.25,-10.738) 41(-6.75,-10.738) 42(-6.25,-10.738) 43(-5.75,-10.738) 44(-5.25,-10.738) 45(-4.75,-10.738) 46(-4.25,-10.738) 47(-3.75,-10.738) 48(-3.25,-10.738) 49(-2.75,-10.738) 50(-2.25,-10.738) 51(-1.75,-10.738) 52(-1.25,-10.738) 53(-0.75,-10.738) 54(-0.25,-10.738) 55(0.25,-10.738) 56(0.75,-10.738) 57(1.25,-10.738) 58(1.75,-10.738) 59(2.25,-10.738) 60(2.75,-10.738) 61(3.25,-10.738) 62(3.75,-10.738) 63(4.25,-10.738) 64(4.75,-10.738) 65(5.25,-10.738) 66(5.75,-10.738) 67(6.25,-10.738) 68(6.75,-10.738) 69(7.25,-10.738) 70(7.75,-10.738) 71(8.25,-10.738) 72(8.75,-10.738) 109(8.75,10.738) 110(8.25,10.738) 111(7.75,10.738) 112(7.25,10.738) 113(6.75,10.738) 114(6.25,10.738) 115(5.75,10.738) 116(5.25,10.738) 117(4.75,10.738) 118(4.25,10.738) 119(3.75,10.738) 120(3.25,10.738) 121(2.75,10.738) 122(2.25,10.738) 123(1.75,10.738) 124(1.25,10.738) 125(0.75,10.738) 126(0.25,10.738) 127(-0.25,10.738) 128(-0.75,10.738) 129(-1.25,10.738) 130(-1.75,10.738) 131(-2.25,10.738) 132(-2.75,10.738) 133(-3.25,10.738) 134(-3.75,10.738) 135(-4.25,10.738) 136(-4.75,10.738) 137(-5.25,10.738) 138(-5.75,10.738) 139(-6.25,10.738) 140(-6.75,10.738) 141(-7.25,10.738) 142(-7.75,10.738) 143(-8.25,10.738) 144(-8.75,10.738)
  silkscreen extent -11.35,-9.65 9.65,9.65, body extent -11,-11 11,11, height 1.61
RESC0402(1005)_L [mm] "Chip Resistor, Body 1.0x0.5mm, IPC High Density"
  rrect25% 0.5x0.55 smd: 1(-0.45,0) 2(0.45,0)
  silkscreen extent 0,-0.2 0,0.2, body extent -0.5,-0.25 0.5,0.25, height 0.3
RYT0009A-MFG [mm]
  rect 0.875x0.25 smd paste+0 mask+0: 1(-0.763,0.25) 2(-0.763,-0.25) 5(0.763,-0.25) 6(0.763,0.25)
  round 0.242 smd paste+0 mask+0: 3(-0.509,-0.828) 7(0.537,0.787) 9(-0.509,0.828)
  round 0.278 smd paste+0 mask+0: 4(0.487,-0.787)
  rect 0.25x0.65 smd paste+0 mask+0: 8(0,0.95)
  Top Layer region: 1.2,-0.675 1.2,-0.825 1.15,-0.875 0.675,-0.875 0.625,-0.925 0.625,-1.225 0.575,-1.275 0.425,-1.275 0.375,-1.225 0.375,-0.912 0.35,-0.868 0.325,-0.825 0.325,-0.675 0.375,-0.625 1.15,-0.625
  Top Layer region: -1.2,-0.675 -1.2,-0.825 -1.15,-0.875 -0.675,-0.875 -0.625,-0.925 -0.625,-1.225 -0.575,-1.275 -0.425,-1.275 -0.375,-1.225 -0.375,-0.912 -0.35,-0.868 -0.325,-0.825 -0.325,-0.675 -0.375,-0.625 -1.15,-0.625
  Top Layer region: 1.2,0.675 1.2,0.825 1.15,0.875 0.675,0.875 0.625,0.925 0.625,1.225 0.575,1.275 0.425,1.275 0.375,1.225 0.375,0.675 0.425,0.625 1.15,0.625
  Top Layer region: -1.2,0.675 -1.2,0.825 -1.15,0.875 -0.675,0.875 -0.625,0.925 -0.625,1.225 -0.575,1.275 -0.425,1.275 -0.375,1.225 -0.375,0.675 -0.425,0.625 -1.15,0.625
  silkscreen extent -1.73,-1.3 1.19,1.3, body extent -1,-1.1 1,1.1, height 1.05
SM08BSRSSTBLFSN [mm]
  rect 0.6x1.55 smd: 1(-3.5,2.288) 2(-2.5,2.288) 3(-1.5,2.288) 4(-0.5,2.288) 5(0.5,2.288) 6(1.5,2.288) 7(2.5,2.288) 8(3.5,2.288)
  rect 1.2x1.8 smd: 9(-4.8,-1.588) 10(4.8,-1.588)
  silkscreen extent -5,-2.29 5,3.6, body extent -5.28,-2.37 5.28,3, height 3.05
SMTC-TSW-102-08-X-S-NA [mm] ".025 SQ Post Terminal Strip Assembly, 1x2 Pins, Right Angle, 2.54mm Pitch, Male"
  rect 1.55x1.55 hole 1.02: 1(0,0)
  round 1.55 hole 1.02: 2(2.54,0)
  silkscreen extent -1.46,1.52 4,4.06, body extent -1.27,-0.32 3.94,9.9, height 2.54
SOD2513X117N [mm]
  rect 1.085x0.55 smd: 1(-1.14,0) 2(1.14,0)
  silkscreen extent -0.51,-0.51 0.51,0.51, body extent -1.25,-0.64 1.25,0.64, height 1.17
SOT230P700X180-4N [mm]
  rect 1.8x0.95 smd: 1(-3.1,2.3) 2(-3.1,0) 3(-3.1,-2.3)
  rect 1.8x3.2 smd: 4(3.1,0)
  silkscreen extent -4,-3.25 1.75,3.25, body extent -3.5,-3.25 3.5,3.25, height 1.68
SSM3J372RLF [mm]
  rect 0.8x0.9 smd: 1(-0.95,-1.05) 2(0.95,-1.05) 3(0,1.05)
  silkscreen extent -1.45,-2.1 1.45,0.9, body extent -1.45,-1.42 1.45,1.42, height 0.98
TPS22991BNRAAR-Footprint-1 [mm]
  rect 0.475x0.2 smd paste+0 mask+0: 1(-0.337,0.2) 2(-0.337,-0.2) 3(0.337,-0.2) 4(0.337,0.2)
  silkscreen extent -1.25,-0.67 0.4,0.67, body extent -0.38,-0.43 0.38,0.43, height 0.6
TSW-110-XX-YY-S [mm]
  round 1.55 hole 1.02: 1(0,0) 2(2.54,0) 3(5.08,0) 4(7.62,0) 5(10.16,0) 6(12.7,0) 7(15.24,0) 8(17.78,0) 9(20.32,0) 10(22.86,0)
  silkscreen extent -1.27,-1.8 24.13,1.27
USBLC62P6 [mm]
  rect 0.3x0.99 smd: 1(-0.5,-0.805) 2(0,-0.805) 3(0.5,-0.805) 4(0.5,0.805) 5(0,0.805) 6(-0.5,0.805)
  silkscreen extent -0.94,-1.29 -0.84,-1.19, body extent -0.75,-0.75 0.75,0.75, height 0.46
VLGA4_AUA_MCH [mil]
  rect 28x28 smd paste+0 mask+0: 1(-24.5,32.48) 2(-24.5,-32.48) 3(24.5,-32.48) 4(24.5,32.48)
  silkscreen extent -109,-7 44,36, body extent -39,-49 39,49, height 35

## Part data
C1 C2 C4 C6 C7 C9 C13 C14 C24 C25 C27 C28 C29 C30 C31 C32 C33 C34 C36 C37 C38 C39 C40 C41 C42 C45: library part C_100nF_0402, "Ceramic Capacitor, Multilayer, Ceramic, 16V, 10% +Tol, 10% -Tol, X7R, +-15% TC, 100nF, Surface Mount, 0402 inch", Case Code (Imperial)=0402, Case Code (Metric)=1005, Dielectric=X7R, Dielectric Material=Ceramic, LCSC Part #=C1525, Manufacturer="Samsung Electro-Mechanics", Manufacturer Part Number=CL05B104KO5NNNC, Max Operating Temperature=125°C, Min Operating Temperature=-55°C, Supplier Part Number=1276-1001-1-ND, Tolerance=10%, Voltage=16V, Case/Package=0402, Category="Ceramic Capacitors", China RoHS=Compliant, ComponentLink1Description=https://datasheet.octopart.com:443/CL05B104KO5NNNC-Samsung-Electro-Mechanics-datasheet-181960518.pdf?src-supplier=IHS, ComponentLink1URL=https://datasheet.octopart.com:443/CL05B104KO5NNNC-Samsung-Electro-Mechanics-datasheet-181960518.pdf?src-supplier=IHS, ComponentLink2Description=https://datasheet.octopart.com:443/CL05B104KO5NNNC-Samsung-Electro-Mechanics-datasheet-81461623.pdf?src-supplier=Upverter, ComponentLink2URL=https://datasheet.octopart.com:443/CL05B104KO5NNNC-Samsung-Electro-Mechanics-datasheet-81461623.pdf?src-supplier=Upverter, ComponentLink3Description=https://datasheet.octopart.com/CL05B104KO5NNNC-Samsung-Electro-Mechanics-datasheet-8324245.pdf, ComponentLink3URL=https://datasheet.octopart.com/CL05B104KO5NNNC-Samsung-Electro-Mechanics-datasheet-8324245.pdf, ComponentLink4Description=https://datasheet.octopart.com/CL05B104KO5NNNC-Samsung-Electro-Mechanics-datasheet-97040617.pdf, ComponentLink4URL=https://datasheet.octopart.com/CL05B104KO5NNNC-Samsung-Electro-Mechanics-datasheet-97040617.pdf, ComponentLink5Description=https://datasheet.octopart.com/General-Multilayer-Ceramic-Capacitors-Samsung-datasheet-family-111.pdf, ComponentLink5URL=https://datasheet.octopart.com/General-Multilayer-Ceramic-Capacitors-Samsung-datasheet-family-111.pdf, ComponentLink6Description=https://datasheet.octopart.com:443/CL05B104KO5NNNC-Samsung-Electro-Mechanics-datasheet-141346863.pdf?src-supplier=Samsung+SCT, ComponentLink6URL=https://datasheet.octopart.com:443/CL05B104KO5NNNC-Samsung-Electro-Mechanics-datasheet-141346863.pdf?src-supplier=Samsung+SCT, ComponentLink7Description=https://datasheet.octopart.com:443/CL05B104KO5NNNC-Samsung-datasheet-151956582.pdf?src-supplier=SOS+electronic, ComponentLink7URL=https://datasheet.octopart.com:443/CL05B104KO5NNNC-Samsung-datasheet-151956582.pdf?src-supplier=SOS+electronic, ComponentLink8Description=https://datasheet.octopart.com:443/CL05B104KO5NNNC-Samsung-datasheet-42485123.pdf?src-supplier=Future+Electronics, ComponentLink8URL=https://datasheet.octopart.com:443/CL05B104KO5NNNC-Samsung-datasheet-42485123.pdf?src-supplier=Future+Electronics, ComponentLink9Description=https://datasheet.octopart.com:443/CL05B104KO5NNNC-Samsung-datasheet-34153835.pdf?src-supplier=Future+Electronics, ComponentLink9URL=https://datasheet.octopart.com:443/CL05B104KO5NNNC-Samsung-datasheet-34153835.pdf?src-supplier=Future+Electronics, ComponentLink10Description=https://datasheet.octopart.com:443/CL05B104KO5NNNC-Samsung-datasheet-26589024.pdf?src-supplier=Future+Electronics, ComponentLink10URL=https://datasheet.octopart.com:443/CL05B104KO5NNNC-Samsung-datasheet-26589024.pdf?src-supplier=Future+Electronics, ComponentLink11Description=https://datasheet.octopart.com:443/CL05B104KO5NNNC-Samsung-Electro-Mechanics-datasheet-149136714.pdf?src-supplier=Future+Electronics, ComponentLink11URL=https://datasheet.octopart.com:443/CL05B104KO5NNNC-Samsung-Electro-Mechanics-datasheet-149136714.pdf?src-supplier=Future+Electronics, ComponentLink12Description=https://datasheet.octopart.com:443/CL05B104KO5NNNC-Samsung-datasheet-59220082.pdf?src-supplier=TME, ComponentLink12URL=https://datasheet.octopart.com:443/CL05B104KO5NNNC-Samsung-datasheet-59220082.pdf?src-supplier=TME, ComponentLink13Description=http://sigma.octopart.com:80/rohs_certificate/General-Multilayer-Ceramic-Capacitors-Samsung-family-110.pdf?src-supplier=Compliance+Statements, ComponentLink13URL=http://sigma.octopart.com:80/rohs_certificate/General-Multilayer-Ceramic-Capacitors-Samsung-family-110.pdf?src-supplier=Compliance+Statements, ComponentLink14Description=http://sigma.octopart.com:80/rohs_statement/General-Multilayer-Ceramic-Capacitors-Samsung-family-132.pdf?src-supplier=Compliance+Statements, ComponentLink14URL=http://sigma.octopart.com:80/rohs_statement/General-Multilayer-Ceramic-Capacitors-Samsung-family-132.pdf?src-supplier=Compliance+Statements, ComponentLink15Description=http://sigma.octopart.com:80/reach_statement/General-Multilayer-Ceramic-Capacitors-Samsung-family-133.pdf?src-supplier=Compliance+Statements, ComponentLink15URL=http://sigma.octopart.com:80/reach_statement/General-Multilayer-Ceramic-Capacitors-Samsung-family-133.pdf?src-supplier=Compliance+Statements, Contact Plating=Tin, Depth=500µm, Height=500µm, Lead Free="Lead Free", Length=1mm, Lifecycle Status=Production, Material=Ceramic, Mounting Technology="Surface Mount", Number of Terminals=2, Pricing="1=0.08, 10=0.009, 50=0.0076, 100=0.0064, 500=0.0056, 1000=0.004, 2500=0.00394 (USD)", Radiation Hardening=No, REACH SVHC=Yes, RoHS=Compliant, Schedule B="8532240020, 8532240020|8532240020|8532240020|8532240020|8532240020|8532240020|8532240020|8532240020|8532240020|8532240020|8532240020|8532240020|8532240020|8532240020|8532240020|8532240020|8532240020|8532240020|8532240020|8532240020|8532240020|8532240020|8532240020|85", Stock=253470, Supplier=DigiKey, Thickness=558.8µm, Voltage Rating=16V, Voltage Rating (DC)=16V, Width=500µm
C3 C5 C8 C11 C15 C18 C19 C21 C22: library part C_10uF_0402, "Ceramic Capacitor, Multilayer, Ceramic, 10V, 20% +Tol, 20% -Tol, X5R, +-15% TC, 10uF, Surface Mount, 0402 inch", Case Code (Imperial)=0402, Case Code (Metric)=1005, Dielectric=X5R, Dielectric Material=Ceramic, LCSC Part #=C315248, Manufacturer="Samsung Electro-Mechanics", Manufacturer Part Number=CL05A106MP5NUNC, Max Operating Temperature=85°C, Min Operating Temperature=-55°C, Supplier Part Number=1276-1450-1-ND, Tolerance=20%, Voltage Rating=10V, Case/Package=0402, Category="Ceramic Capacitors", China RoHS=Compliant, ComponentLink1Description=https://datasheet.octopart.com:443/CL05A106MP5NUNC-Samsung-Electro-Mechanics-datasheet-182018593.pdf?src-supplier=IHS, ComponentLink1URL=https://datasheet.octopart.com:443/CL05A106MP5NUNC-Samsung-Electro-Mechanics-datasheet-182018593.pdf?src-supplier=IHS, ComponentLink2Description=https://datasheet.octopart.com:443/CL05A106MP5NUNC-Samsung-Electro-Mechanics-datasheet-136031723.pdf?src-supplier=Upverter, ComponentLink2URL=https://datasheet.octopart.com:443/CL05A106MP5NUNC-Samsung-Electro-Mechanics-datasheet-136031723.pdf?src-supplier=Upverter, ComponentLink3Description=https://datasheet.octopart.com:443/CL05A106MP5NUNC-Samsung-Electro-Mechanics-datasheet-110226206.pdf?src-supplier=Future+Electronics, ComponentLink3URL=https://datasheet.octopart.com:443/CL05A106MP5NUNC-Samsung-Electro-Mechanics-datasheet-110226206.pdf?src-supplier=Future+Electronics, ComponentLink4Description=https://datasheet.octopart.com:443/CL05A106MP5NUNC-Samsung-Electro-Mechanics-datasheet-87580039.pdf?src-supplier=Future+Electronics, ComponentLink4URL=https://datasheet.octopart.com:443/CL05A106MP5NUNC-Samsung-Electro-Mechanics-datasheet-87580039.pdf?src-supplier=Future+Electronics, ComponentLink5Description=https://datasheet.octopart.com:443/CL05A106MP5NUNC-Samsung-Electro-Mechanics-datasheet-81461595.pdf?src-supplier=Future+Electronics, ComponentLink5URL=https://datasheet.octopart.com:443/CL05A106MP5NUNC-Samsung-Electro-Mechanics-datasheet-81461595.pdf?src-supplier=Future+Electronics, ComponentLink6Description=https://datasheet.octopart.com:443/CL05A106MP5NUNC-Samsung-datasheet-42280527.pdf?src-supplier=Future+Electronics, ComponentLink6URL=https://datasheet.octopart.com:443/CL05A106MP5NUNC-Samsung-datasheet-42280527.pdf?src-supplier=Future+Electronics, ComponentLink7Description=https://datasheet.octopart.com:443/CL05A106MP5NUNC-Samsung-datasheet-34153002.pdf?src-supplier=Future+Electronics, ComponentLink7URL=https://datasheet.octopart.com:443/CL05A106MP5NUNC-Samsung-datasheet-34153002.pdf?src-supplier=Future+Electronics, ComponentLink8Description=https://datasheet.octopart.com:443/CL05A106MP5NUNC-Samsung-datasheet-25077983.pdf?src-supplier=Future+Electronics, ComponentLink8URL=https://datasheet.octopart.com:443/CL05A106MP5NUNC-Samsung-datasheet-25077983.pdf?src-supplier=Future+Electronics, ComponentLink9Description=https://datasheet.octopart.com:443/CL05A106MP5NUNC-Samsung-Electro-Mechanics-datasheet-149136670.pdf?src-supplier=Future+Electronics, ComponentLink9URL=https://datasheet.octopart.com:443/CL05A106MP5NUNC-Samsung-Electro-Mechanics-datasheet-149136670.pdf?src-supplier=Future+Electronics, ComponentLink10Description=https://datasheet.octopart.com:443/CL05A106MP5NUNC-Samsung-datasheet-8326407.pdf?src-supplier=TME, ComponentLink10URL=https://datasheet.octopart.com:443/CL05A106MP5NUNC-Samsung-datasheet-8326407.pdf?src-supplier=TME, Contact Plating=Tin, Depth=500µm, Height=700µm, Lead Free="Lead Free", Length=1mm, Lifecycle Status=NRND, Material=Ceramic, Mounting Technology="Surface Mount", Number of Terminals=2, Packaging="Tape and Reel", Pricing="1=0.08, 10=0.038, 50=0.034, 100=0.0296, 500=0.0272, 1000=0.02, 2500=0.01844 (USD)", Radiation Hardening=No, REACH SVHC=Yes, RoHS=Compliant, Schedule B="8532240020, 8532240020|8532240020|8532240020|8532240020|8532240020|8532240020|8532240020|8532240020|8532240020|8532240020|8532240020|8532240020|8532240020|8532240020|8532240020|8532240020|8532240020|8532240020|8532240020|8532240020|8532240020|8532240020|8532240020|85", Stock=1973072, Supplier=DigiKey, Termination=Wraparound, Thickness=711.2µm, Voltage Rating (DC)=10V, Width=500µm
C10 C12 C23 C26: library part CMP-001-00091-2, "Ceramic Capacitor, Multilayer, Ceramic, 35V, 10% +Tol, 10% -Tol, X5R, 15% TC, 1uF, Surface Mount, 0402", Capacitor Type=Ceramic, Case/Package=0402, LCSC Part Number=C307413, Manufacturer=Samsung, Max Operating Temperature=85°C, Min Operating Temperature=-55°C, Package Height=0.32mm, Package Length=1mm, Package Shape=Rectangular, Package Style=SMTMeter, Package Width=0.5mm, Power=62.5mW, Rated DC Voltage (URdc)=35V, Rated Temperature=70°C, Resistor Type="FIXED RESISTOR", Temperature Characteristics Code=X5R, Temperature Coefficient=100ppm/°C, Tolerance=1%, Tolerance  (fill in as +-)=10%, Working Voltage=50V, Additional Feature="LASER TRIMMABLE", Category="Ceramic Capacitors", Component Type=Standard, ComponentLink1Description=https://datasheet.ciiva.com:443/pdfs/VipMasterIC/IC/SEMS/SEMS-S-A0008384515/SEMS-S-A0008872905-1.pdf?src-supplier=IHS+Markit, ComponentLink1URL=https://datasheet.ciiva.com:443/pdfs/VipMasterIC/IC/SEMS/SEMS-S-A0008384515/SEMS-S-A0008872905-1.pdf?src-supplier=IHS+Markit, ComponentLink2Description=http://www.samsungsem.com/kr/support/product-search/mlcc/CL05A105KL5NRNC.jsp?src-supplier=Digikey, ComponentLink2URL=http://www.samsungsem.com/kr/support/product-search/mlcc/CL05A105KL5NRNC.jsp?src-supplier=Digikey, ComponentLink3Description=https://datasheet.octopart.com/CL05A105KL5NRNC-Samsung-datasheet-8326407.pdf?src-supplier=TME, ComponentLink3URL=https://datasheet.octopart.com/CL05A105KL5NRNC-Samsung-datasheet-8326407.pdf?src-supplier=TME, ComponentLink4Description=https://datasheet.ciiva.com:443/pdfs/VipMasterIC/IC/YAGO/YAGO-S-A0003597364/YAGO-S-A0003597364-1.pdf?src-supplier=IHS+Markit, ComponentLink4URL=https://datasheet.ciiva.com:443/pdfs/VipMasterIC/IC/YAGO/YAGO-S-A0003597364/YAGO-S-A0003597364-1.pdf?src-supplier=IHS+Markit, ComponentLink5Description=https://datasheet.ciiva.com/12656/pyu-ac-51-rohs-l-2-12656634.pdf?src-supplier=Mouser, ComponentLink5URL=https://datasheet.ciiva.com/12656/pyu-ac-51-rohs-l-2-12656634.pdf?src-supplier=Mouser, Construction=Chip, Design Item ID=CL05A105KL5NRNC, Dielectric Material=Ceramic, JESD-609 Code=e3, Manufacturer Part Number=CL05A105KL5NRNC, Mounting Technology="Surface Mount", Multilayer=Yes, Packaging="Tape and Reel", Pins=2, Pricing="1=0.31, 10=0.181, 50=0.1296, 100=0.1136, 500=0.08658, 1000=0.07816, 2500=0.06921, 5000=0.06379, 10000=0.0593, 20000=0.05558, 30000=0.0537, 50000=0.05162, 70000=0.0504, 100000=0.04922 (USD)", Reach SVHC Compliant=Yes, Reference Standard=AEC-Q200, RoHS=Yes, RoHS Compliant=Yes, Source=Hybrids_Avionics.SCHLIB, Stock=299048, Technology="METAL GLAZE/THICK FILM", Terminal Finish=Nickel, Termination=Wraparound, Tolerance (fill in as +-)=10%
C16: library part C_22uF_0402_1, "CAP CER 22UF 10V X5R 0402", Case/Package=0402, Dielectric=X5R, Dielectric Material=Ceramic, LCSC Part #=C3845593, Manufacturer=Murata, Manufacturer Lifecycle Status="IN PRODUCTION", Manufacturer Part Number=GRM158R61A226ME15D, Max Operating Temperature=85°C, Min Operating Temperature=-55°C, Supplier Part Number=490-GRM158R61A226ME15DCT-ND, Tolerance=20%, Voltage Rating=10V, Category="Ceramic Capacitors", ComponentLink1Description=https://datasheet.octopart.com:443/GRM158R61A226ME15D-Murata-datasheet-165579666.pdf?src-supplier=TME, ComponentLink1URL=https://datasheet.octopart.com:443/GRM158R61A226ME15D-Murata-datasheet-165579666.pdf?src-supplier=TME, ComponentLink2Description=https://datasheet.octopart.com/GRM158R61A226ME15D-Murata-datasheet-12515295.pdf, ComponentLink2URL=https://datasheet.octopart.com/GRM158R61A226ME15D-Murata-datasheet-12515295.pdf, ComponentLink3Description=https://datasheet.octopart.com/GRM158R61A226ME15D-Murata-datasheet-12510076.pdf, ComponentLink3URL=https://datasheet.octopart.com/GRM158R61A226ME15D-Murata-datasheet-12510076.pdf, ComponentLink4Description=https://datasheet.octopart.com/GRM158R61A226ME15D-Murata-datasheet-11978611.pdf, ComponentLink4URL=https://datasheet.octopart.com/GRM158R61A226ME15D-Murata-datasheet-11978611.pdf, ComponentLink5Description=https://datasheet.octopart.com/GRM158R61A226ME15D-Murata-datasheet-10025737.pdf, ComponentLink5URL=https://datasheet.octopart.com/GRM158R61A226ME15D-Murata-datasheet-10025737.pdf, ComponentLink6Description=https://datasheet.octopart.com/GRM158R61A226ME15D-Murata-datasheet-8819587.pdf, ComponentLink6URL=https://datasheet.octopart.com/GRM158R61A226ME15D-Murata-datasheet-8819587.pdf, ComponentLink7Description=http://sigma.octopart.com:80/reach_statement/Murata-company-16.pdf?src-supplier=Compliance+Statements, ComponentLink7URL=http://sigma.octopart.com:80/reach_statement/Murata-company-16.pdf?src-supplier=Compliance+Statements, Height=800µm, Length=1mm, Lifecycle Status=Production, Material=Ceramic, Mounting Technology="Surface Mount", Number of Terminals=2, Pricing="1=0.41, 10=0.247, 50=0.1828, 100=0.1632, 500=0.1301, 1000=0.1199, 2500=0.10912, 8000=0.09979, 16000=0.09611, 24000=0.09372, 40000=0.09107, 56000=0.09089, 80000=0.08732 (USD)", REACH SVHC=Yes, RoHS=Compliant, Stock=154156, Supplier=DigiKey, Thickness=800µm, Voltage Rating (DC)=10V, Width=500µm
C17 C35: library part C_4.7uF_0402, "CAP CER 4.7UF 16V X5R 0402", Capacitor Type=Ceramic, Case/Package=0402, LCSC Part #=C318563, Manufacturer=Samsung, Manufacturer Part Number=CL05A475MO5NUNC, Max Operating Temperature=85°C, Min Operating Temperature=-55°C, Package Shape=Rectangular, Package Style=SMTMeter, Rated DC Voltage (URdc)=16V, Supplier Part Number=1276-6836-1-ND, Temperature Characteristics Code=X5R, Tolerance  (fill in as +-)=20%, Category="Ceramic Capacitors", ComponentLink1Description=https://datasheet.ciiva.com:443/pdfs/VipMasterIC/IC/SEMS/SEMS-S-A0008384515/SEMS-S-A0008898881-1.pdf?src-supplier=IHS+Markit, ComponentLink1URL=https://datasheet.ciiva.com:443/pdfs/VipMasterIC/IC/SEMS/SEMS-S-A0008384515/SEMS-S-A0008898881-1.pdf?src-supplier=IHS+Markit, ComponentLink2Description=http://www.farnell.com/datasheets/2710653.pdf?src-supplier=Farnell, ComponentLink2URL=http://www.farnell.com/datasheets/2710653.pdf?src-supplier=Farnell, ComponentLink3Description=http://www.samsungsem.com/kr/support/product-search/mlcc/CL05A475MO5NUNC.jsp?src-supplier=Digikey, ComponentLink3URL=http://www.samsungsem.com/kr/support/product-search/mlcc/CL05A475MO5NUNC.jsp?src-supplier=Digikey, ComponentLink4Description=http://www.farnell.com/datasheets/2710653.pdf?src-supplier=Newark, ComponentLink4URL=http://www.farnell.com/datasheets/2710653.pdf?src-supplier=Newark, ComponentLink5Description=http://www.farnell.com/datasheets/2710653.pdf?src-supplier=Element14, ComponentLink5URL=http://www.farnell.com/datasheets/2710653.pdf?src-supplier=Element14, ComponentLink6Description=https://datasheet.octopart.com/CL05A475MO5NUNC-Samsung-Electro-Mechanics-datasheet-123102911.pdf?src-supplier=Future+Electronics, ComponentLink6URL=https://datasheet.octopart.com/CL05A475MO5NUNC-Samsung-Electro-Mechanics-datasheet-123102911.pdf?src-supplier=Future+Electronics, Dielectric Material=Ceramic, Height=0.7mm, JESD-609 Code=e3, Length=1mm, Mounting Technology="Surface Mount", Multilayer=Yes, Packaging="Tape and Reel", Pins=2, Pricing="1=0.43, 10=0.252, 50=0.1826, 100=0.161, 500=0.12446, 1000=0.11305, 2500=0.10094, 5000=0.0936, 10000=0.08752, 20000=0.08248, 30000=0.07994, 50000=0.07712, 70000=0.07547, 100000=0.07387 (USD)", Reach SVHC Compliant=Yes, RoHS=Yes, RoHS Compliant=Yes, Stock=200989, Supplier=Digikey, Terminal Finish=Nickel, Termination=Wraparound, Tolerance (fill in as +-)=20%, Width=0.5mm
C20: library part C_3.3nF_0402, "CAP CER 3300PF (3.3nF) 10V X7R 0402", Case Code (Imperial)=0402, Case Code (Metric)=1005, Dielectric=X7R, Dielectric Material=Ceramic, LCSC Part #=C20793063, Manufacturer="Samsung Electro-Mechanics", Manufacturer Part Number=CL05B332KA5VPNC, Max Operating Temperature=125°C, Min Operating Temperature=-55°C, Supplier Part Number=1276-CL05B332KA5VPNCCT-ND, Tolerance=10%, Voltage Rating=25V, Case/Package=0402, Category="Ceramic Capacitors", China RoHS=Compliant, ComponentLink1Description=https://datasheet.octopart.com:443/CL05B332KA5VPNC-Samsung-Electro-Mechanics-datasheet-176142735.pdf?src-supplier=IHS, ComponentLink1URL=https://datasheet.octopart.com:443/CL05B332KA5VPNC-Samsung-Electro-Mechanics-datasheet-176142735.pdf?src-supplier=IHS, ComponentLink2Description=https://datasheet.octopart.com:443/C0402C332M8RACTU-KEMET-datasheet-178445679.pdf?src-supplier=IHS, ComponentLink2URL=https://datasheet.octopart.com:443/C0402C332M8RACTU-KEMET-datasheet-178445679.pdf?src-supplier=IHS, ComponentLink3Description=https://datasheet.octopart.com:443/C0402C332M8RACTU-KEMET-datasheet-137357759.pdf?src-supplier=Upverter, ComponentLink3URL=https://datasheet.octopart.com:443/C0402C332M8RACTU-KEMET-datasheet-137357759.pdf?src-supplier=Upverter, ComponentLink4Description=https://datasheet.octopart.com:443/C0402C332M8RACTU-KEMET-datasheet-157246124.pdf?src-supplier=Electro+Sonic, ComponentLink4URL=https://datasheet.octopart.com:443/C0402C332M8RACTU-KEMET-datasheet-157246124.pdf?src-supplier=Electro+Sonic, ComponentLink5Description=https://datasheet.octopart.com/C0402C332M8RACTU-KEMET-datasheet-84169754.pdf, ComponentLink5URL=https://datasheet.octopart.com/C0402C332M8RACTU-KEMET-datasheet-84169754.pdf, Height=500µm, Length=1mm, Lifecycle Status=Production, Material=Ceramic, Mounting Technology="Surface Mount", Number of Terminals=2, Pins=2, Pricing="1=0.1, 10=0.034, 50=0.0226, 100=0.0193, 500=0.0138, 1000=0.01212, 2500=0.01034, 5000=0.00928 (USD)", REACH SVHC=Yes, RoHS=Compliant, Stock=24876, Supplier=DigiKey, Termination=SMD/SMT, Voltage Rating (DC)=25V, Weight=652.039032µg, Width=500µm
C43 C44: library part C_2.2uF_0402_1, "Ceramic Capacitor, Ceramic, 25V, 20% +Tol, 20% -Tol, X5R, 15% TC, 2.2uF, Surface Mount, 0402", Case Code (Imperial)=0402, Case Code (Metric)=1005, Dielectric=C0G, Dielectric Material=Ceramic, Insulation Resistance=10GΩ, LCSC Part #=C723363, Manufacturer="Yageo Group", Manufacturer Part Number=CC0402MRX5R8BB225, Max Operating Temperature=125°C, Min Operating Temperature=-55°C, Supplier Part Number=13-CC0402MRX5R8BB225CT-ND, Supplier Part Number 1=13-CC0402KRX5R8BB225CT-ND, Temperature Coefficient=30ppm/°C, Voltage Rating=50V, Case/Package=0402, Category="Ceramic Capacitors", China RoHS=Compliant, ComponentLink1Description=https://datasheet.octopart.com:443/CC0402CRNPO9BN2R7-Yageo-datasheet-182140217.pdf?src-supplier=IHS, ComponentLink1URL=https://datasheet.octopart.com:443/CC0402CRNPO9BN2R7-Yageo-datasheet-182140217.pdf?src-supplier=IHS, ComponentLink2Description=https://datasheet.octopart.com:443/CC0402CRNPO9BN2R7-Yageo-datasheet-151948684.pdf?src-supplier=Farnell, ComponentLink2URL=https://datasheet.octopart.com:443/CC0402CRNPO9BN2R7-Yageo-datasheet-151948684.pdf?src-supplier=Farnell, ComponentLink3Description=https://datasheet.octopart.com:443/CC0402CRNPO9BN2R7-Yageo-datasheet-181966735.pdf?src-supplier=Farnell, ComponentLink3URL=https://datasheet.octopart.com:443/CC0402CRNPO9BN2R7-Yageo-datasheet-181966735.pdf?src-supplier=Farnell, ComponentLink4Description=https://datasheet.octopart.com:443/CC0402CRNPO9BN2R7-Yageo-datasheet-137875056.pdf?src-supplier=Future+Electronics, ComponentLink4URL=https://datasheet.octopart.com:443/CC0402CRNPO9BN2R7-Yageo-datasheet-137875056.pdf?src-supplier=Future+Electronics, ComponentLink5Description=https://datasheet.octopart.com:443/CC0402CRNPO9BN2R7-Yageo-datasheet-136957424.pdf?src-supplier=Future+Electronics, ComponentLink5URL=https://datasheet.octopart.com:443/CC0402CRNPO9BN2R7-Yageo-datasheet-136957424.pdf?src-supplier=Future+Electronics, ComponentLink6Description=https://datasheet.octopart.com:443/CC0402CRNPO9BN2R7-Yageo-datasheet-137700082.pdf?src-supplier=Future+Electronics, ComponentLink6URL=https://datasheet.octopart.com:443/CC0402CRNPO9BN2R7-Yageo-datasheet-137700082.pdf?src-supplier=Future+Electronics, ComponentLink7Description=https://datasheet.octopart.com:443/CC0402CRNPO9BN2R7-Yageo-datasheet-78855684.pdf?src-supplier=Future+Electronics, ComponentLink7URL=https://datasheet.octopart.com:443/CC0402CRNPO9BN2R7-Yageo-datasheet-78855684.pdf?src-supplier=Future+Electronics, ComponentLink8Description=https://datasheet.octopart.com:443/CC0402CRNPO9BN2R7-Yageo-datasheet-24578986.pdf?src-supplier=Future+Electronics, ComponentLink8URL=https://datasheet.octopart.com:443/CC0402CRNPO9BN2R7-Yageo-datasheet-24578986.pdf?src-supplier=Future+Electronics, ComponentLink9Description=https://datasheet.octopart.com:443/CC0402CRNPO9BN2R7-Yageo-datasheet-16730043.pdf?src-supplier=Future+Electronics, ComponentLink9URL=https://datasheet.octopart.com:443/CC0402CRNPO9BN2R7-Yageo-datasheet-16730043.pdf?src-supplier=Future+Electronics, ComponentLink10Description=https://datasheet.octopart.com:443/CC0402CRNPO9BN2R7-Yageo-datasheet-12589826.pdf?src-supplier=Future+Electronics, ComponentLink10URL=https://datasheet.octopart.com:443/CC0402CRNPO9BN2R7-Yageo-datasheet-12589826.pdf?src-supplier=Future+Electronics, ComponentLink11Description=https://datasheet.octopart.com:443/CC0402CRNPO9BN2R7-Yageo-datasheet-10406438.pdf?src-supplier=Newark, ComponentLink11URL=https://datasheet.octopart.com:443/CC0402CRNPO9BN2R7-Yageo-datasheet-10406438.pdf?src-supplier=Newark, ComponentLink12Description=https://datasheet.octopart.com:443/CC0402CRNPO9BN2R7-Yageo-datasheet-65873193.pdf?src-supplier=Newark, ComponentLink12URL=https://datasheet.octopart.com:443/CC0402CRNPO9BN2R7-Yageo-datasheet-65873193.pdf?src-supplier=Newark, ComponentLink13Description=https://datasheet.octopart.com:443/CC0402CRNPO9BN2R7-Yageo-datasheet-68296204.pdf?src-supplier=Megastar, ComponentLink13URL=https://datasheet.octopart.com:443/CC0402CRNPO9BN2R7-Yageo-datasheet-68296204.pdf?src-supplier=Megastar, ComponentLink14Description=http://sigma.octopart.com:80/rohs_statement/Yageo-company-2.pdf?src-supplier=Compliance+Statements, ComponentLink14URL=http://sigma.octopart.com:80/rohs_statement/Yageo-company-2.pdf?src-supplier=Compliance+Statements, ComponentLink15Description=http://sigma.octopart.com:80/conflict_mineral_statement/Yageo-company-3.pdf?src-supplier=Compliance+Statements, ComponentLink15URL=http://sigma.octopart.com:80/conflict_mineral_statement/Yageo-company-3.pdf?src-supplier=Compliance+Statements, ComponentLink16Description=https://datasheet.octopart.com:443/CC0402MRX5R8BB225-Yageo-datasheet-170350636.pdf?src-supplier=IHS, ComponentLink16URL=https://datasheet.octopart.com:443/CC0402MRX5R8BB225-Yageo-datasheet-170350636.pdf?src-supplier=IHS, ComponentLink17Description=https://datasheet.octopart.com:443/CC0402MRX5R8BB225-Yageo-datasheet-78855684.pdf?src-supplier=Upverter, ComponentLink17URL=https://datasheet.octopart.com:443/CC0402MRX5R8BB225-Yageo-datasheet-78855684.pdf?src-supplier=Upverter, ComponentLink18Description=https://datasheet.octopart.com:443/CC0402MRX5R8BB225-Yageo-datasheet-181967557.pdf?src-supplier=Farnell, ComponentLink18URL=https://datasheet.octopart.com:443/CC0402MRX5R8BB225-Yageo-datasheet-181967557.pdf?src-supplier=Farnell, ComponentLink19Description=https://datasheet.octopart.com:443/CC0402MRX5R8BB225-Yageo-datasheet-181967556.pdf?src-supplier=Farnell, ComponentLink19URL=https://datasheet.octopart.com:443/CC0402MRX5R8BB225-Yageo-datasheet-181967556.pdf?src-supplier=Farnell, ComponentLink20Description=https://datasheet.octopart.com:443/CC0402MRX5R8BB225-Yageo-datasheet-145016144.pdf?src-supplier=ODG+(Origin+Data+Global), ComponentLink20URL=https://datasheet.octopart.com:443/CC0402MRX5R8BB225-Yageo-datasheet-145016144.pdf?src-supplier=ODG+(Origin+Data+Global), ComponentLink21Description=https://datasheet.octopart.com/CC0402MRX5R8BB225-Yageo-datasheet-86397281.pdf, ComponentLink21URL=https://datasheet.octopart.com/CC0402MRX5R8BB225-Yageo-datasheet-86397281.pdf, Composition=Ceramic, Depth=500µm, Halogen Free="Halogen Free", Height=500µm, Lead Free="Lead Free", Length=1mm, Lifecycle Status=Production, Material=Ceramic, Mounting Technology="Surface Mount", Number of Terminals=2, Packaging="Tape & Reel (TR)", Pins=2, Pricing="1=0.3, 10=0.176, 50=0.1282, 100=0.1135, 500=0.08336, 1000=0.08124, 2500=0.07321, 5000=0.06838 (USD)", Radiation Hardening=No, REACH SVHC=Yes, RoHS=Compliant, Schedule B="8532240020, 8532240020|8532240020|8532240020|8532240020|8532240020", Stock=20337, Supplier=DigiKey, Supplier 1=DigiKey, Termination=SMD/SMT, Thickness=558.8µm, Voltage Rating (DC)=50V, Weight=652.039032µg, Width=500µm